# EAGLE board rev_l_v17 (EAGLE 9.7.0), part 1 of 2
REV: L
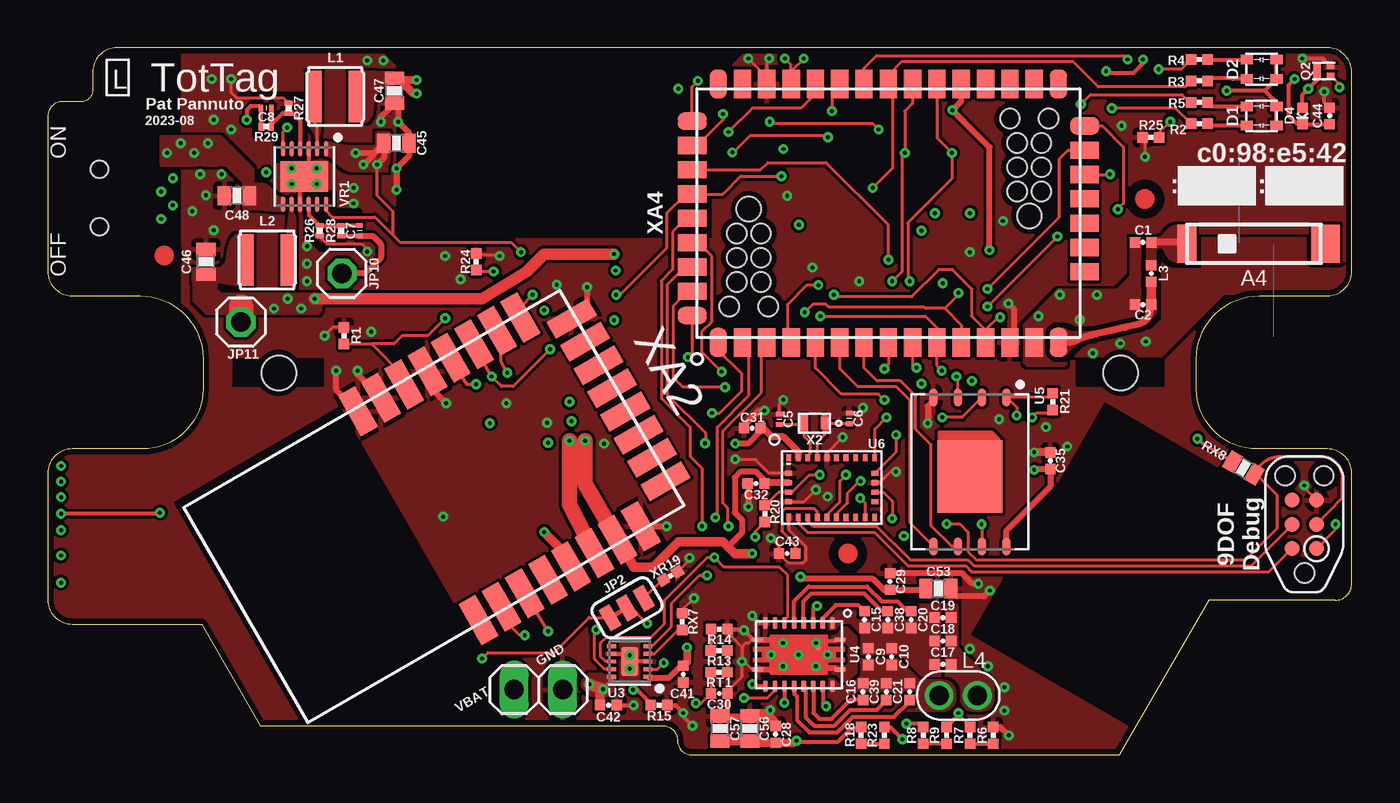
[diagram p0: board, top side]
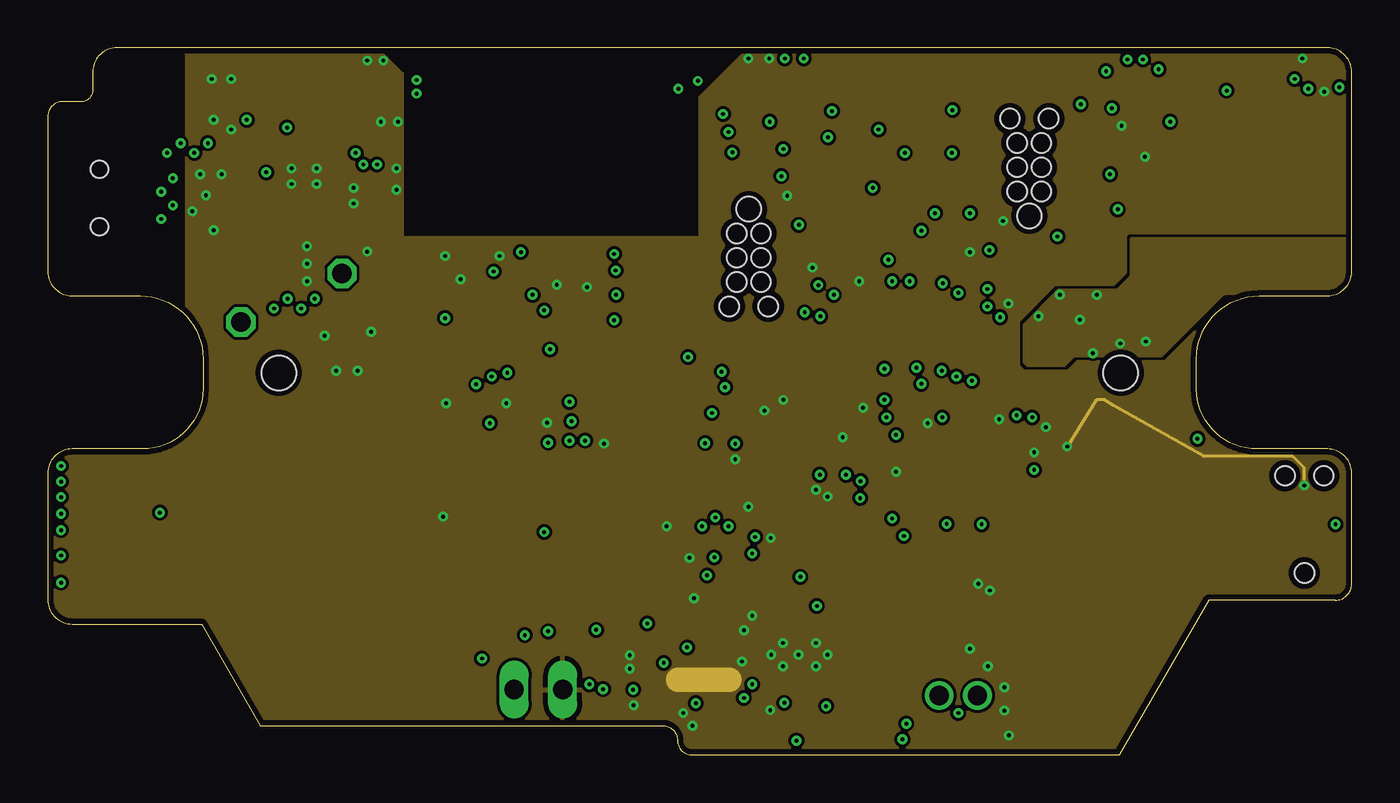
[diagram p1: board, inner layer Route2]
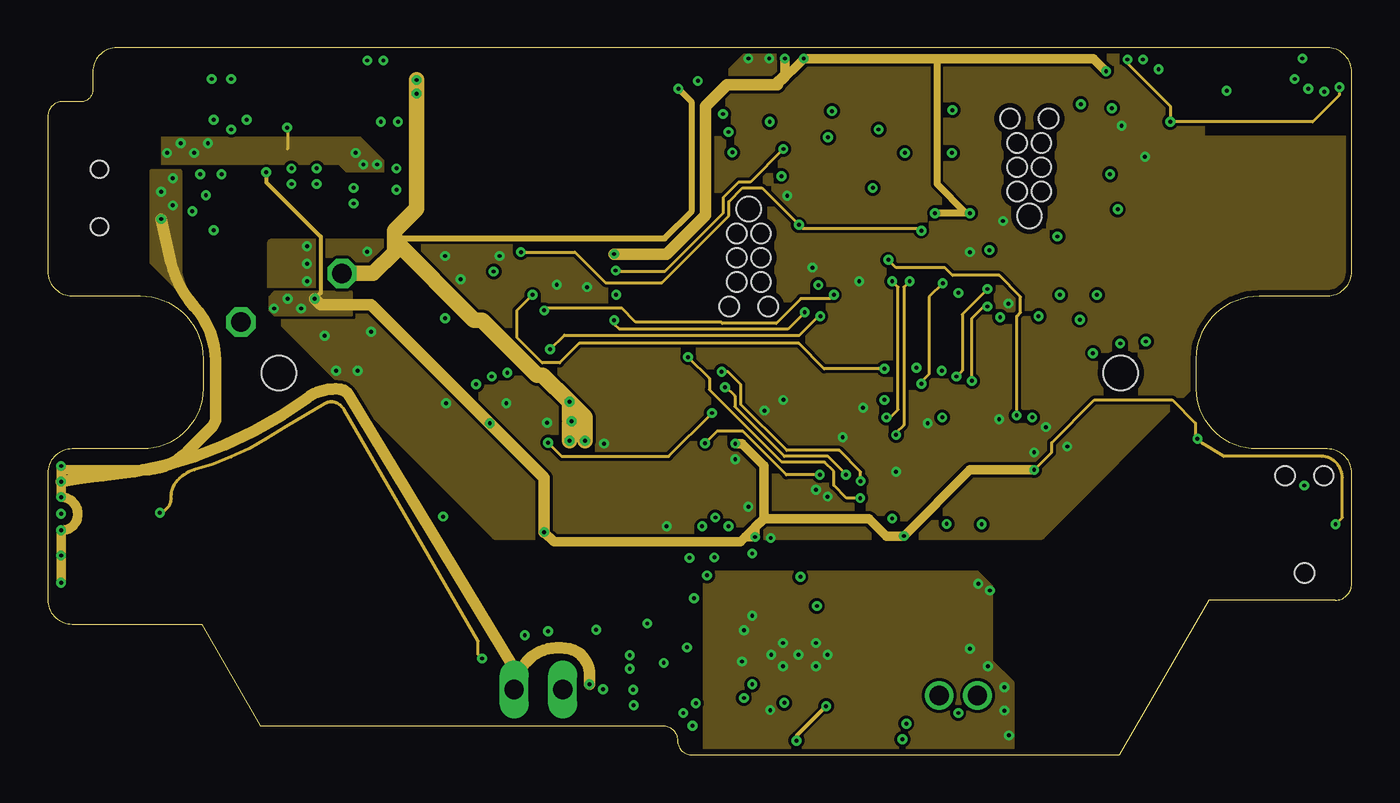
[diagram p2: board, inner layer Route15]
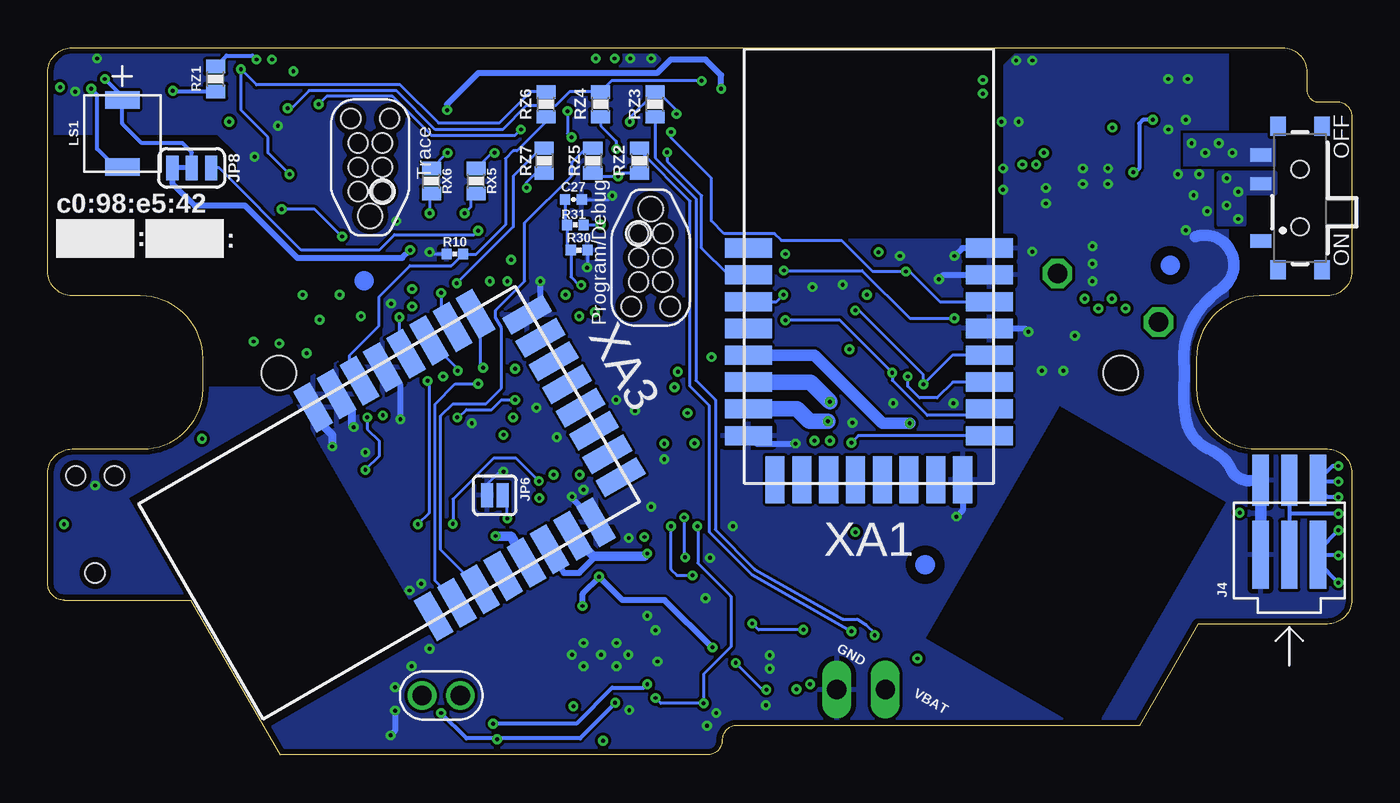
[diagram p3: board, bottom side, seen from below]

Size 68.14 x 36.93 mm. Coordinates in mm from the lower left corner, seen from the top.
Outline: 66.87,36.93 3.61,36.93 arc90 2.34,35.66 2.34,34.7 arc-90 1.76,34.12 0.76,34.12 arc90 0,33.36 0,25.25 arc90 1.27,23.98 4.83,23.98 arc-90 8.11,20.69 8.11,19.14 arc-90 4.95,15.98 1.27,15.98 arc90 0,14.71 0,8.1 arc90 1.27,6.83 8.03,6.83 11.11,1.52 32.14,1.52 arc-90 32.9,0.76 arc90 33.66,0 55.99,0 60.66,8.08 67.29,8.08 arc90 68.14,8.92 68.14,14.71 arc90 66.87,15.98 63.18,15.98 arc-90 60.02,19.14 60.02,20.69 arc-90 63.31,23.98 66.87,23.98 arc90 68.14,25.25 68.14,35.66 arc90 66.87,36.93
Copper layers (1+2*15+16): Top 0.0356mm / dielectric 0.18mm / Route2 0.0356mm / dielectric 1.03mm / Route15 0.0356mm / dielectric 0.18mm / Bottom 0.0356mm
Design rules "quickturn_co_kr_1oz_4lyr *": minimum track width 6mil, minimum drill 8mil, track to track 6mil, track to pad 6mil, pad to pad 6mil, via to via 12mil, smd to smd 6mil, copper to edge 12mil, drill to drill 12mil, minimum pad ring 8mil, minimum via ring 6mil, stop-mask expansion 4mil, vias tented up to drill 10mil, thermal gap 10mil
Net classes: 1 BLE_RF: width 0.356 mm, clearance 0.254 mm; 2 UWB_RF: width 0.356 mm, clearance 0.254 mm
Holes 1.8 mm at 12.07,19.95 56.07,19.95
tRestrict: area 9.7,19.3 to 14.4,20.7; area 53.8,19.3 to 58.3,20.7; area 13.4,26.4 to 16.5,29.4; area 10,31 to 13.5,34.6

## Footprints (pad centres in the part's own frame; a part is rotated, then mirrored left to right if it is on the bottom)
AMCA72-2R470G-S1F-T = smd 2 x 1.5: NC 0,3.75 | smd 2 x 1: S1 0,-3.5
0402_CAP = smd 0.536 x 0.546: 1 -0.433,0; 2 0.433,0
0201_CAP = smd 0.25 x 0.35: P$1 -0.275,0; P$2 0.275,0
0603_CAP = smd 0.7 x 1: 1 -0.65,0; 2 0.65,0
LED-0606 = smd 0.65 x 0.5: A1 0.775,0.5; A2 0.775,-0.5; C1 -0.775,0.5; C2 -0.775,-0.5
0402_DIODE = smd 0.536 x 0.546: ANODE -0.433,0; CATHODE 0.433,0
TC2030-IDC-NL = smd 0.787 x 0.787: 1 -1.27,-0.635; 2 -1.27,0.635; 3 0,-0.635; 4 0,0.635; 5 1.27,-0.635; 6 1.27,0.635 | hole 1.016: -2.54,0; 2.54,1.016; 2.54,-1.016
MOLEX-PICO-SPOX-3_SIDE = smd 3.55 x 0.85: 1 -1.725,1.5; 2 -1.725,0; 3 -1.725,-1.5 | smd 2.65 x 0.85: 1SUPP 2.175,1.5; 2SUPP 2.175,0; 3SUPP 2.175,-1.5
SMT-JUMPER_3_1-NC_TRACE_SILK = smd 0.635 x 1.27: 1 -1.016,0; 2 0,0; 3 1.016,0
SMT-JUMPER_2_NO_SILK = smd 0.635 x 1.27: 1 -0.406,0; 2 0.406,0
1X02 = drill 1.016 long: 1 -1.27,0; 2 1.27,0
1X01 = drill 1.016 octagon: 1 0,0
NRX3015 = smd 0.8 x 2.7: P$1 -1.1,0; P$2 1.1,0
WURTH_COIL_760308103204 = drill 1: P$1 0,1; P$2 0,-1
SMT-0440-T-2-R = smd 0.9 x 1.8: + 1.75,0; - -1.75,0
XFDFN-3 = smd 0.4 x 0.7: D 0.35,0 | smd 0.4 x 0.25: G -0.35,0.215; S -0.35,-0.215
0402_RES = smd 0.536 x 0.546: 1 -0.433,0; 2 0.433,0
0201_RES = smd 0.28 x 0.43: 1 -0.255,0; 2 0.255,0
0603-RES = smd 0.7 x 1: 1 -0.65,0; 2 0.65,0
450404015514 = smd 0.7 x 1.1: 1 2.25,-2.05; 2 -0.75,-2.05; 3 -2.25,-2.05 | smd 1 x 0.8: Z1 -3.75,1.15; Z2 3.75,1.15; Z3 3.75,-1.15; Z4 -3.75,-1.15 | hole 0.9: -1.5,0; 1.5,0
DSQ0010A = smd 0.5 x 0.2: 1 -0.95,0.8; 2 -0.95,0.4; 3 -0.95,0; 4 -0.95,-0.4; 5 -0.95,-0.8; 6 0.95,-0.8; 7 0.95,-0.4; 8 0.95,0; 9 0.95,0.4; 10 0.95,0.8 | smd 0.9 x 1.5: PAD 0,0
RHL0020A = smd 0.24 x 0.6: 1 -0.775,2.15; 10 -0.775,-2.15; 11 0.775,-2.15; 20 0.775,2.15 | smd 0.6 x 0.24: 2 -1.65,1.75; 3 -1.65,1.25; 4 -1.65,0.75; 5 -1.65,0.25; 6 -1.65,-0.25; 7 -1.65,-0.75; 8 -1.65,-1.25; 9 -1.65,-1.75; 12 1.65,-1.75; 13 1.65,-1.25; 14 1.65,-0.75; 15 1.65,-0.25; 16 1.65,0.25; 17 1.65,0.75; 18 1.65,1.25; 19 1.65,1.75; PAD -0.55,1
WSON127P800X600X80-9T430X340N = smd 0.94 x 0.445: 1 -3.896,1.905; 2 -3.896,0.635; 3 -3.896,-0.635; 4 -3.896,-1.905; 5 3.896,-1.905; 6 3.896,-0.635; 7 3.896,0.635; 8 3.896,1.905 | smd 3.8 x 3.4: PAD 0.25,0
LGA28R0P510X4_5P2X3P8X1 = smd 0.25 x 0.375: 1 -2.25,1.562; 6 -2.25,-1.562; 7 -1.75,-1.562; 8 -1.25,-1.562; 9 -0.75,-1.562; 10 -0.25,-1.562; 11 0.25,-1.562; 12 0.75,-1.562; 13 1.25,-1.562; 14 1.75,-1.562; 15 2.25,-1.562; 20 2.25,1.562; 21 1.75,1.562; 22 1.25,1.562; 23 0.75,1.562; 24 0.25,1.562; 25 -0.25,1.562; 26 -0.75,1.562; 27 -1.25,1.562; 28 -1.75,1.562 | smd 0.375 x 0.25: 2 -2.263,0.75; 3 -2.263,0.25; 4 -2.263,-0.25; 5 -2.263,-0.75; 16 2.263,-0.75; 17 2.263,-0.25; 18 2.263,0.25; 19 2.263,0.75
SON45P300X300X80-13T160X250N = smd 0.813 x 0.224: 1 -1.445,1.125; 2 -1.445,0.675; 3 -1.445,0.225; 4 -1.445,-0.225; 5 -1.445,-0.675; 6 -1.445,-1.125; 7 1.445,-1.125; 8 1.445,-0.675; 9 1.445,-0.225; 10 1.445,0.225; 11 1.445,0.675; 12 1.445,1.125 | smd 1.6 x 2.5: 13 0,0
TXC-9HT12 = smd 0.4 x 0.6: 1 -0.53,0 | smd 0.4 x 0.86: 2 0.53,0
DWM3000 = smd 2.45 x 1: 1 -6.295,12.3; 2 -6.295,10.9; 3 -6.295,9.5; 4 -6.295,8.1; 5 -6.295,6.7; 6 -6.295,5.3; 7 -6.295,3.9; 8 -6.295,2.5; 17 6.295,2.5; 18 6.295,3.9; 19 6.295,5.3; 20 6.295,6.7; 21 6.295,8.1; 22 6.295,9.5; 23 6.295,10.9; 24 6.295,12.3 | smd 1 x 2.45: 9 -4.9,0.205; 10 -3.5,0.205; 11 -2.1,0.205; 12 -0.7,0.205; 13 0.7,0.205; 14 2.1,0.205; 15 3.5,0.205; 16 4.9,0.205
APOLLO4_BLUEPLUS_MODULE = smd 1.5 x 0.9: P1 -6.75,8.89; P2 -6.75,7.62; P3 -6.75,6.35; P4 -6.75,5.08; P5 -6.75,3.81; P6 -6.75,2.54; P7 -6.75,1.27; P8 -6.75,0; P9 -6.75,-1.27; P10 -6.75,-2.54; P11 -6.75,-3.81; P12 -6.75,-5.08; P13 -6.75,-6.35; P14 -6.75,-7.62; P15 -6.75,-8.89; P25 6.75,-8.89; P26 6.75,-7.62; P27 6.75,-6.35; P28 6.75,-5.08; P29 6.75,-3.81; P30 6.75,-2.54; P31 6.75,-1.27; P32 6.75,0; P33 6.75,1.27; P34 6.75,2.54; P35 6.75,3.81; P36 6.75,5.08; P37 6.75,6.35; P38 6.75,7.62; P39 6.75,8.89 | smd 0.9 x 1.5: P18 -3.06,-10.25; P19 -1.79,-10.25; P20 -0.52,-10.25; P21 0.75,-10.25; P22 2.02,-10.25; P23 3.29,-10.25; P24 4.56,-10.25; P40 4.81,10.25; P41 3.54,10.25; P42 2.27,10.25; P43 1,10.25; P44 -0.27,10.25; P45 -1.54,10.25; P46 -2.81,10.25; P47 -4.08,10.25; P48 -5.35,10.25 | hole 1.27: -0.143,-7.366; 0.213,7.29 | hole 1.016: 4.937,-6.35; 4.937,-8.382; 1.127,-8.001; 1.127,-6.731; 2.397,-8.001; 2.397,-6.731; 3.667,-6.731; 3.667,-8.001; -4.867,6.274; -4.867,8.306; -1.057,7.925; -1.057,6.655; -2.327,7.925; -2.327,6.655; -3.597,6.655; -3.597,7.925

## Placement (x,y rotation side)
A4  AMCA72-2R47G-S1F-T  [AMCA72-2R470G-S1F-T]  63.02,26.7 270 top
C1  0.5pF  [0402_CAP]  57.23,26.77 180 top
C2  0.8pF  [0402_CAP]  57.23,23.52 180 top
C5  4pF  [0201_CAP]  38.23,17.53 270 top
C6  4pF  [0201_CAP]  41.89,17.58 270 top
C7  22pF  [0201_CAP]  16.29,27.38 90 top
C8  22pF  [0201_CAP]  11.41,33.78 180 top
C9  470pF  [0402_CAP]  42.88,5.13 270 top
C10  470pF  [0402_CAP]  44.1,5.13 270 top
C15  10nF  [0402_CAP]  42.68,7.06 270 top
C16  10nF  [0402_CAP]  42.6,3.3 90 top
C17  22nF  [0402_CAP]  46.77,4.72 0 top
C18  22nF  [0402_CAP]  46.77,5.94 0 top
C19  22nF  [0402_CAP]  46.77,7.16 0 top
C20  22nF  [0402_CAP]  45.12,7.06 270 top
C21  22nF  [0402_CAP]  45.04,3.3 90 top
C27  0.1uF  [0402_CAP]  40.67,29.01 0 bottom
C28  0.1uF  [0402_CAP]  38.03,1.07 90 top
C29  0.1uF  [0402_CAP]  44.01,9.05 90 top
C30  0.1uF  [0402_CAP]  35.08,3.2 0 top
C31  0.1uF  [0402_CAP]  36.81,17.07 180 top
C32  0.1uF  [0402_CAP]  37.01,14.17 180 top
C35  0.1uF  [0402_CAP]  52.39,15.36 90 top
C38  0.47uF  [0402_CAP]  43.9,7.06 270 top
C39  0.47uF  [0402_CAP]  43.82,3.3 90 top
C41  1uF  [0402_CAP]  33.2,4.22 270 top
C42  1uF  [0402_CAP]  29.29,2.59 0 top
C43  1uF  [0402_CAP]  38.64,10.52 180 top
C44  1uF  [0402_CAP]  66.99,33.38 90 top
C45  4.7uF  [0603_CAP]  18.22,31.95 180 top
C46  4.7uF  [0603_CAP]  8.26,25.76 90 top
C47  4.7uF  [0603_CAP]  18.12,34.7 90 top
C48  4.7uF  [0603_CAP]  9.89,29.21 180 top
C53  10uF  [0603_CAP]  46.54,8.69 0 top
C56  10uF  [0603_CAP]  36.68,1.37 90 top
C57  10uF  [0603_CAP]  35.13,1.37 90 top
D1  BICOLOR-SMD  [LED-0606]  63.43,33.38 0 top
D2  BICOLOR-SMD  [LED-0606]  63.43,35.81 0 top
D4  DIODE0402  [0402_DIODE]  65.56,33.38 270 top
FD1  FIDUCIAL  [FIDUCIAL_1MM-CU_2MM-MASK]  6.08,26.09 0 top
FD2  FIDUCIAL  [FIDUCIAL_1MM-CU_2MM-MASK]  57.34,29.03 0 top
FD3  FIDUCIAL  [FIDUCIAL_1MM-CU_2MM-MASK]  41.81,10.52 0 top
FD4  FIDUCIAL  [FIDUCIAL_1MM-CU_2MM-MASK]  9.48,25.58 0 bottom
FD5  FIDUCIAL  [FIDUCIAL_1MM-CU_2MM-MASK]  51.6,24.77 0 bottom
FD6  FIDUCIAL  [FIDUCIAL_1MM-CU_2MM-MASK]  22.29,9.93 0 bottom
J1  TC2030-JLINK-NL  [TC2030-IDC-NL]  65.67,12.04 90 top
J4  MOLEX-PICO-SPOX-3SIDE  [MOLEX-PICO-SPOX-3_SIDE]  3.26,12.17 90 bottom
JP2  JUMPER-SMT_3_1-NC_TRACE_SILK  [SMT-JUMPER_3_1-NC_TRACE_SILK]  30.26,7.67 210 top
JP6  JUMPER-SMT_2_NO_SILK  [SMT-JUMPER_2_NO_SILK]  44.78,13.56 0 bottom
JP8  JUMPER-SMT_3_1-NC_TRACE_SILK  [SMT-JUMPER_3_1-NC_TRACE_SILK]  60.61,30.66 180 bottom
JP9  [1X02]  25.64,3.4 0 top
JP10  [1X01]  15.37,25.15 180 top
JP11  [1X01]  10.09,22.61 0 top
L1  10uH  [NRX3015]  15.02,34.39 0 top
L2  10uH  [NRX3015]  11.46,25.86 0 top
L3  4.7nH  [0402_CAP]  57.66,25.15 270 top
L4  WURTH_COIL_760308103204  [WURTH_COIL_760308103204]  47.58,3.1 270 top
LS1  PUI_SMT-0440-T-2-R  [SMT-0440-T-2-R]  64.24,32.46 90 bottom
Q2  MOSFET-NCHANNELXFDN-3  [XFDFN-3]  66.68,35.71 180 top
R1  100k  [0402_RES]  15.48,21.89 270 top
R2  5.1  [0402_RES]  60.18,32.97 180 top
R3  5.1  [0402_RES]  60.18,35.2 180 top
R4  15  [0402_RES]  60.18,36.32 180 top
R5  15  [0402_RES]  60.18,34.09 180 top
R6  97.6  [0402_RES]  49.41,1.02 90 top
R7  97.6  [0402_RES]  48.19,1.02 270 top
R8  162  [0402_RES]  45.75,1.02 270 top
R9  162  [0402_RES]  46.97,1.02 90 top
R10  100k  [0402_RES]  46.87,26.16 0 bottom
R13  1k  [0402_RES]  35.08,5.44 0 top
R14  1k  [0402_RES]  35.08,6.56 180 top
R15  2.2k  [0402_RES]  31.93,2.59 180 top
R18  10k  [0402_RES]  42.5,1.02 270 top
R20  10k  [0402_RES]  37.47,12.6 270 top
R21  10k  [0402_RES]  52.51,18.45 270 top
R23  10k  [0402_RES]  43.72,1.02 90 top
R24  100k  [0402_RES]  22.38,25.76 270 top
R25  100k  [0402_RES]  57.64,32.26 180 top
R26  261k  [0201_RES]  14.21,27.38 90 top
R27  402k  [0201_RES]  12.58,33.78 270 top
R28  845k  [0201_RES]  15.32,27.38 270 top
R29  845k  [0201_RES]  11.41,32.82 0 top
R30  1.87M  [0402_RES]  40.37,26.37 180 bottom
R31  5.1M  [0402_RES]  40.57,27.69 0 bottom
RT1  10k@25C  [0402_RES]  35.08,4.31 180 top
RX5  DNP  [0603-RES]  45.75,29.97 90 bottom
RX6  DNP  [0603-RES]  48.09,29.97 90 bottom
RX7  DNP  [0402_RES]  33.15,6.96 270 top
RX8  DNP  [0603-RES]  62.48,14.99 150 top
RZ1  0  [0603-RES]  59.37,35.31 90 bottom
RZ2  0  [0603-RES]  37.22,31.04 270 bottom
RZ3  0  [0603-RES]  36.4,33.99 90 bottom
RZ4  0  [0603-RES]  39.25,33.99 90 bottom
RZ5  0  [0603-RES]  39.66,31.04 270 bottom
RZ6  0  [0603-RES]  42.09,33.99 90 bottom
RZ7  0  [0603-RES]  42.2,31.04 270 bottom
S1  [450404015514]  2.7,29.08 270 bottom
U3  BQ24040  [DSQ0010A]  30.41,4.88 180 top
U4  BQ51013B  [RHL0020A]  39.25,5.23 270 top
U5  W25N01GWZEIG  [WSON127P800X600X80-9T430X340N]  48.19,14.78 270 top
U6  BNO055  [LGA28R0P510X4_5P2X3P8X1]  40.96,13.96 0 top
VR1  RT8020RT8020GQW  [SON45P300X300X80-13T160X250N]  13.41,30.21 270 top
X2  TXC-9HT12  [TXC-9HT12]  40.06,17.32 180 top
XA1  DWM3000  [DWM3000]  25.23,14.17 0 bottom
XA2  DWM3000  [DWM3000]  30,18.64 120 top
XA3  DWM3000  [DWM3000]  40.47,18.85 120 bottom
XA4  APOLLO4_BLUEPLUS_MODULE  [APOLLO4_BLUEPLUS_MODULE]  43.92,28.3 90 top
XR19  10k  [0402_RES]  32.54,9.35 210 top

## Library data of the parts
A4 = antennas; DESCRIPTION: RF ANT 2.4GHZ CHIP SOLDER SMD; DIGIKEY: 535-14108-1-ND; MPN: AMCA72-2R470G-S1F-T4
C1 = passives; MPN: GJM1555C1HR50WB01D
C2 = passives; MPN: GJM1555C1HR80WB01D
C5 C6 = passives; MANUFACTURER: Murata; MPN: GRM0335C1H4R0BA01D
C7 C8 = passives; MPN: GRM0335C1H220FA01D
C9 C10 = passives; DESCRIPTION: CAP CER 470PF 50V C0G/NP0 0402; DIGIKEY: 490-6242-1-ND; MANUFACTURER: Murata; MPN: GRM1555C1H471JA01J
C15 C16 = passives; DIGIKEY: 490-6351-2-ND; MPN: GRM155R71H103KA88J
C17-C19 = passives; DIGIKEY: 490-10699-2-ND; MPN: GRM155R71E223JA61D
C20 C21 = passives; DIGIKEY: 311-3823-1-ND; MPN: CC0402ZRY5V8BB223
C27-C30 = passives; DIGIKEY: 490-6328-1-ND; MPN: GRM155R71C104KA88J
C31 C32 C35 = passives; MPN: CL05A104KP5NNNC
C38 C39 = passives; DIGIKEY: 490-12270-1-ND; MPN: GRT155R61E474ME01D
C41-C44 = passives; MPN: GRM155R70J105KA12J
C45-C48 = passives; APPLICATION: SMPS Filter; MPN: C1608X7S1A475K080AC
C53 C56 C57 = passives; DIGIKEY: 1253-CM105X5R106M25ATCT-ND; MPN: CM105X5R106M25AT
D1 = leds; MPN: MCL0606FRD1GR1T
D2 = leds; MPN: MCL0606FYW1RD1T
D4 = passives; DIGIKEY: 641-2087-1-ND; MPN: CDSQR400B-HF
FD1-FD6 XA1-XA4 = Quorvo
J1 = connector
J4 = connector; DIGIKEY: WM7647CT-ND; MFN: 874380343
JP2 JP6 JP8 = SparkFun-Jumpers
JP9-JP11 = pinhead
L1 L2 = passives; MANUFACTURER: TAIYO YUDEN; MPN: NR3015T100M
L3 = passives; MPN: LQW15AN4N7G8ZD
L4 = ac; DIGIKEY: 732-5258-ND; MANUFACTURER: Würth Elektronik; MPN: 760308103204
LS1 = audio; DIGIKEY: 668-SMT-0440-T-2-RTR-ND; MPN: SMT-0440-T-2-R
Q2 = fets; DIGIKEY: DMN2400UFB4-7DICT-ND
R1 R10 R24 R25 = passives; MPN: RT0402BRE07100KL
R2 R3 = passives; MPN: RC0402JR-075R1L
R4 R5 = passives; MPN: RC0402JR-0715RL
R6 R7 = passives; DIGIKEY: RMCF0402FT97R6CT-ND; MPN: RMCF0402FT97R6
R8 R9 = passives; DIGIKEY: RMCF0402FT162RCT-ND; MPN: RMCF0402FT162R
R13 R14 RX5-RX8 = passives
R15 = passives; DIGIKEY: RMCF0402JT2K20CT-ND; MPN: RMCF0402JT2K20
R18 R20 R21 R23 XR19 = passives; DIGIKEY: 311-10KJRCT-ND; MPN: RC0402JR-0710KL
R26 = passives; MPN: ERJ-1GNF2613C
R27 = passives; MPN: ERJ-1GNF4023C
R28 R29 = passives; MPN: ERJ-1GNF8453C
R30 = passives; MPN: RMCF0402FT1M87; TOLERANCE: 1%
R31 = passives; DIGIKEY: RMCF0402FT5M10CT-ND; MPN: RMCF0402FT5M10; TOLERANCE: 1%
RT1 = passives; DIGIKEY: 490-18149-1-ND; MPN: NCU15XH103F60RC
RZ1-RZ7 = passives; CAN_SUBSTITUE: YES; MPN: RMCF0603ZT0R00
S1 = Wurth_Switch_WS-SLSU; DATASHEET-URL: https://www.we-online.com/catalog/datasheet/450404015514.pdf; DIGIKEY: 732-13665-1-ND; IR: 300mA; PACKAGING: Tape and Reel; PART-NUMBER: 450404015514; QTY: 150; VR: 5V(DC)
U3 = chips; DIGIKEY: 296-37142-1-ND; MPN: BQ24040DSQR
U4 = chips; DIGIKEY: 296-38885-1-ND; MPN: BQ51013BRHLR
U5 = Quorvo; MANUFACTURER: Winbond; MPN: W25N01GWZEIG
U6 = Quorvo; MANUFACTURER: Bosch Scientific; MPN: BNO055
VR1 = regulators; MANUFACTURER: RichTek; MPN: RT8020GQW
X2 = crystals; C-LOAD: 7pF; FREQUENCY: 32.768 kHz; MANUFACTURER: TXC Corp; MPN: 9HT12-32.768KDZY-T

## Nets
9DOF_!BOOT_LOAD_PIN: R20.1 U6.4 XA4.P46
9DOF_!RESET: J1.3 RX8.1 U6.11 XA4.P45
9DOF_BL_IND: U6.10 XA4.P47
9DOF_CAP: C43.1 U6.9
9DOF_INT: U6.14 XA4.P48
9DOF_SCL-COM1: RX6.2 U6.19 XA4.P30
9DOF_SDA-COM0: RX5.2 U6.20 XA4.P31
9DOF_SWCLK: J1.4 U6.8
9DOF_SWDIO: J1.2 U6.7
9DOF_XI: C5.P$2 U6.27 X2.2
9DOF_XO: C6.P$2 U6.26 X2.1
!CHG: U3.8 U4.7 XA4.P2
!DWM1_RST: RZ2.2 RZ5.2 XA1.3 XA4.P43
!DWM1_SPI_CS: XA1.17 XA4.P1
!DWM2_RST: RZ2.1 XA2.3
!DWM2_SPI_CS: XA2.17 XA4.P8
!DWM3_RST: RZ5.1 XA3.3
!DWM3_SPI_CS: XA3.17 XA4.P9
!PG: U3.5 XA4.P3
+1V8: C8.P$2 C31.1 C35.1 C46.1 J1.1 JP11.1 L2.P$1 R20.2 R21.2 R29.1 RX5.1 RX6.1 RX8.2 RZ1.2 U5.8 U6.28 XA1.5 XA2.5 XA3.5 XA4.P36
+2V5: C7.P$1 C32.1 C47.2 JP8.3 JP10.1 L1.P$2 R28.2 U6.3 XA1.6 XA1.7 XA2.6 XA2.7 XA3.6 XA3.7 XA4.P29
AGND [BLE_RF]: C1.2 C2.2 XA4.P14
AP4_LED1_GREEN: R2.2 RZ4.2 XA4.P40
AP4_LED1_RED: R5.2 RZ3.2 XA4.P41
AP4_LED2_BLUE_COMM: D1.C1 R5.1
AP4_LED2_RED: R4.2 RZ6.2 XA4.P22
AP4_LED2_YELLOW: R3.2 RZ7.2 XA4.P32
AP4_LED_BLUE_COMM: D2.C2 R3.1
AP4_LED_GREEN_COMM: D2.C1 R4.1
AP4_LED_RED_COMM: D1.C2 R2.1
AP4_RFIOP [BLE_RF]: C2.1 L3.2 XA4.P15
BATIN: C27.1 R30.2 R31.1 XA4.P4
BATT_THERM: J4.2 J4.2SUPP JP2.3
BATT_TS: JP2.2 U3.9
BLE_ANT_FEED [BLE_RF]: A4.S1 C1.1 L3.1
BQ_AC1: C9.1 C10.1 C15.2 C17.1 C18.1 C19.1 C20.2 C38.2 U4.2
BQ_AC2: C9.2 C10.2 C16.2 C21.2 C39.2 L4.P$2 U4.19
BQ_BOOT1: C15.1 U4.3
BQ_BOOT2: C16.1 U4.17
BQ_CLAMP1: C38.1 U4.5
BQ_CLAMP2: C39.1 U4.16
BQ_COMM1: C20.1 U4.6
BQ_COMM2: C21.1 U4.15
BQ_FOD: R7.1 R9.2 R23.2 U4.14
BQ_ILM: R8.1 U4.12
BQ_ISET: R15.2 U3.2
BQ_RECT: C28.1 C56.1 C57.1 R18.1 U4.18
BUZZER_GATE: Q2.G R25.1 XA4.P33
BUZZER_SUPPLY: C44.1 D4.CATHODE JP8.2 LS1.+
COIL_AC1: C17.2 C18.2 C19.2 L4.P$1
DW_SPI_CIPO: XA1.19 XA2.19 XA3.19 XA4.P10
DW_SPI_CLK: XA1.20 XA2.20 XA3.20 XA4.P12
DW_SPI_COPI: XA1.18 XA2.18 XA3.18 XA4.P11
DWM1_IRQ: R24.2 XA1.22 XA4.P35
DWM1_WAKEUP: XA1.2 XA4.P34
DWM2_IRQ: R1.2 RZ4.1 XA2.22
DWM2_WAKEUP: RZ3.1 XA2.2
DWM3_IRQ: R10.2 RZ6.1 XA3.22
DWM3_WAKEUP: RZ7.1 XA3.2
FLASH_!CS: R21.1 U5.1 XA4.P42
FLASH_!HOLD!-IO3: U5.7 XA4.P24
FLASH_!WP!-IO2: U5.3 XA4.P23
FLASH_CLK: U5.6 XA4.P7
FLASH_PDI-IO0: U5.5 XA4.P6
FLASH_PDO-IO1: U5.2 XA4.P5
GND: C5.P$1 C6.P$1 C27.2 C28.2 C29.2 C30.2 C31.2 C32.2 C35.2 C41.2 C42.2 C43.2 C44.2 C45.1 C46.2 C47.1 C48.2 C53.2 C56.2 C57.2 J1.5 J4.1 J4.1SUPP JP6.1 JP9.2 Q2.S R1.1 R6.2 R10.1 R14.1 R15.1 R24.1 R25.2 R26.1 R27.1 R30.1 RX7.1 U3.3 U3.7 U3.PAD U4.1 U4.9 U4.10 U4.11 U4.20 U4.PAD U5.4 U6.2 U6.5 U6.6 U6.18 U6.25 VR1.3 VR1.9 VR1.13 XA1.8 XA1.16 XA1.21 XA1.23 XA1.24 XA2.8 XA2.16 XA2.21 XA2.23 XA2.24 XA3.8 XA3.16 XA3.21 XA3.23 XA3.24 XA4.P13 XA4.P37 XR19.1
LED_SUP: D1.A1 D1.A2 D2.A1 D2.A2 RZ1.1
N$2: D4.ANODE LS1.- Q2.D
N$28: R6.1 R7.2
N$42: JP6.2 U6.17
N$47: JP2.1 XR19.2
N$49: RX7.2 U3.4
N$64: R18.2 R23.1
N$66: R8.2 R9.1
N$69: R13.2 RT1.1
N$70: R13.1 R14.2
QI_TS_CTRL: C30.1 RT1.2 U4.13 XA4.P44
VBAT: C42.1 J4.3 J4.3SUPP JP9.1 S1.2 U3.10
VBAT_SWITCHED: C45.2 C48.1 JP8.1 R31.2 S1.3 VR1.1 VR1.6 VR1.7 VR1.12
VQI: C29.1 C41.1 C53.1 U3.1 U4.4
VR1_FB1: C8.P$1 R27.2 R29.2 VR1.4
VR1_FB2: C7.P$2 R26.2 R28.1 VR1.10
VR1_LX1: L2.P$2 VR1.8
VR1_LX2: L1.P$1 VR1.2